# Altium PCB PCB2.PcbDoc
Units mil, origin at the board's own origin, x right, y up, seen from the top; angles counter-clockwise.
Board outline 1205 x 1375 mil, 4 copper layers (Top Layer, Top Layer 1, Bottom Layer 1, Bottom Layer), stack 29.312 mil thick; 23 components, 28 nets, 122 pads, 18 vias.
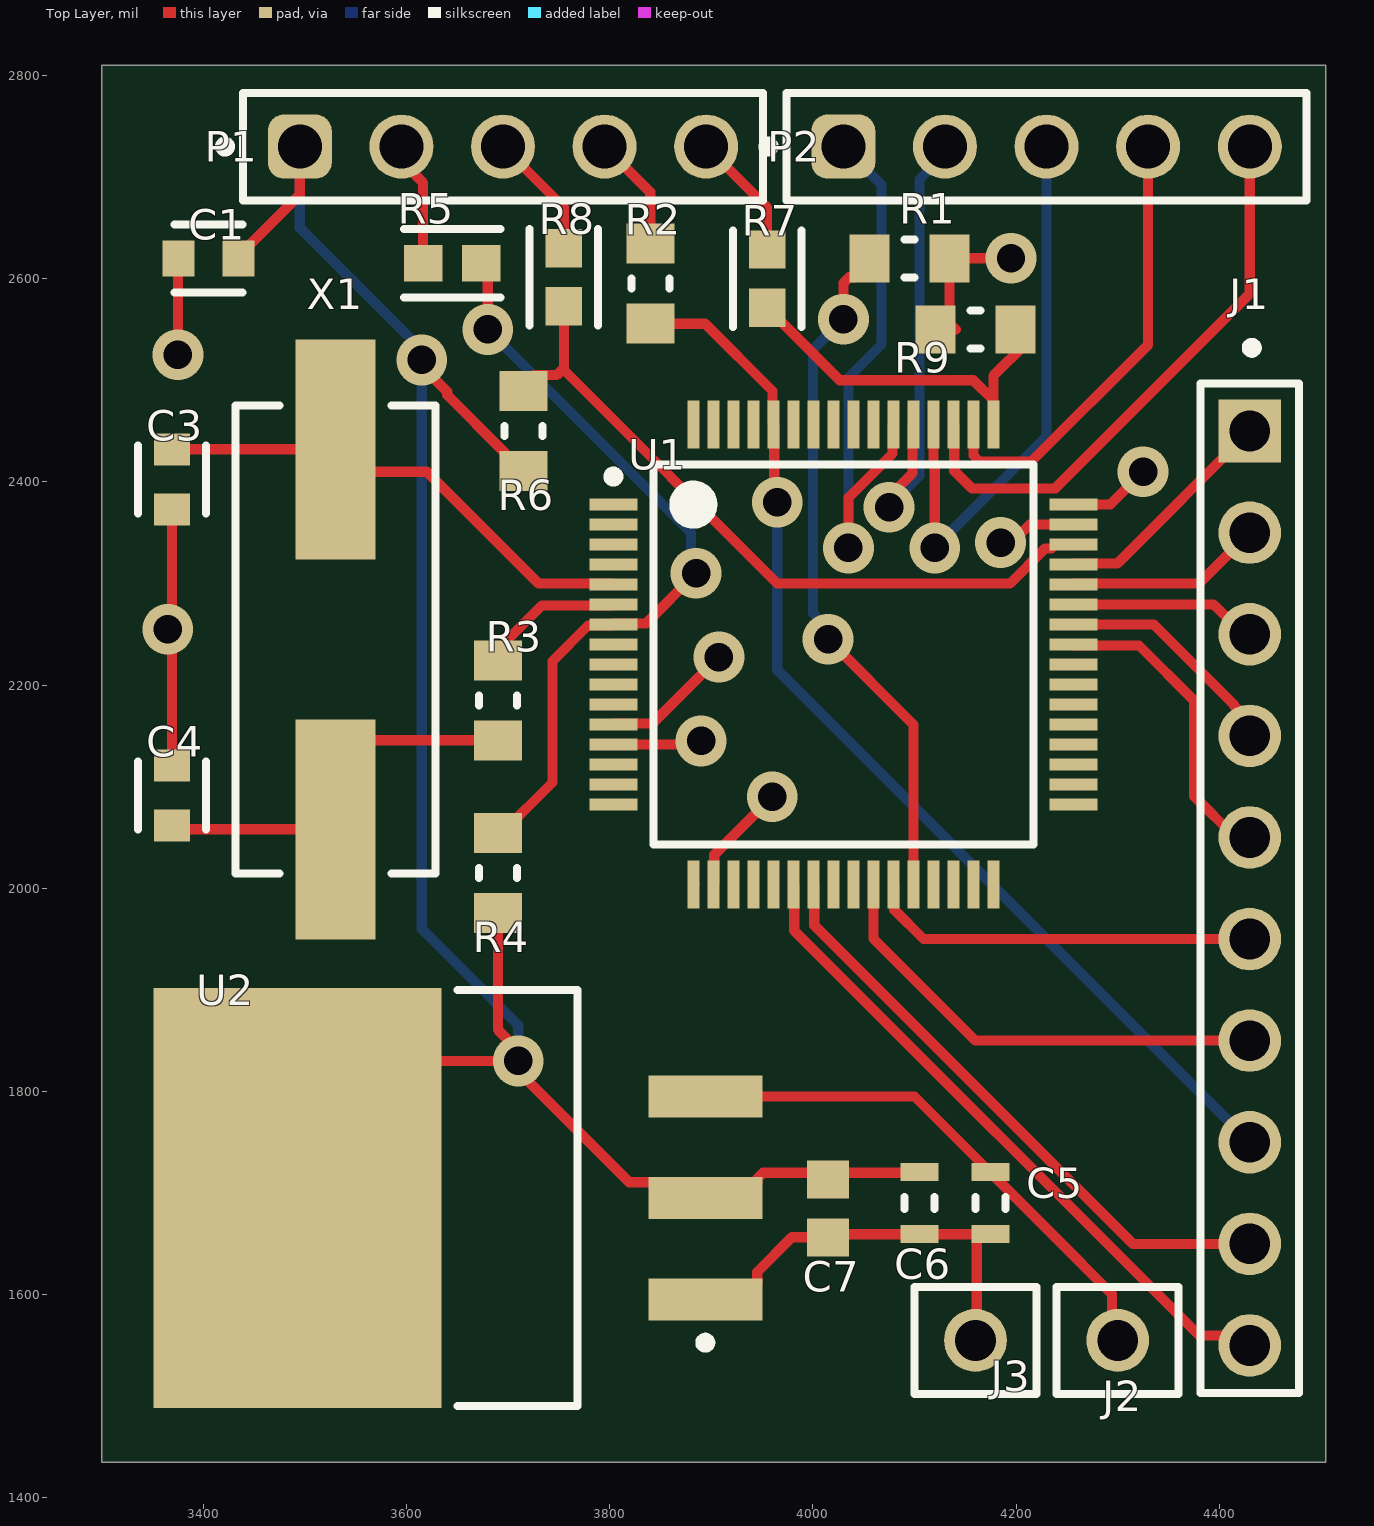
[diagram p0: Top Layer view]
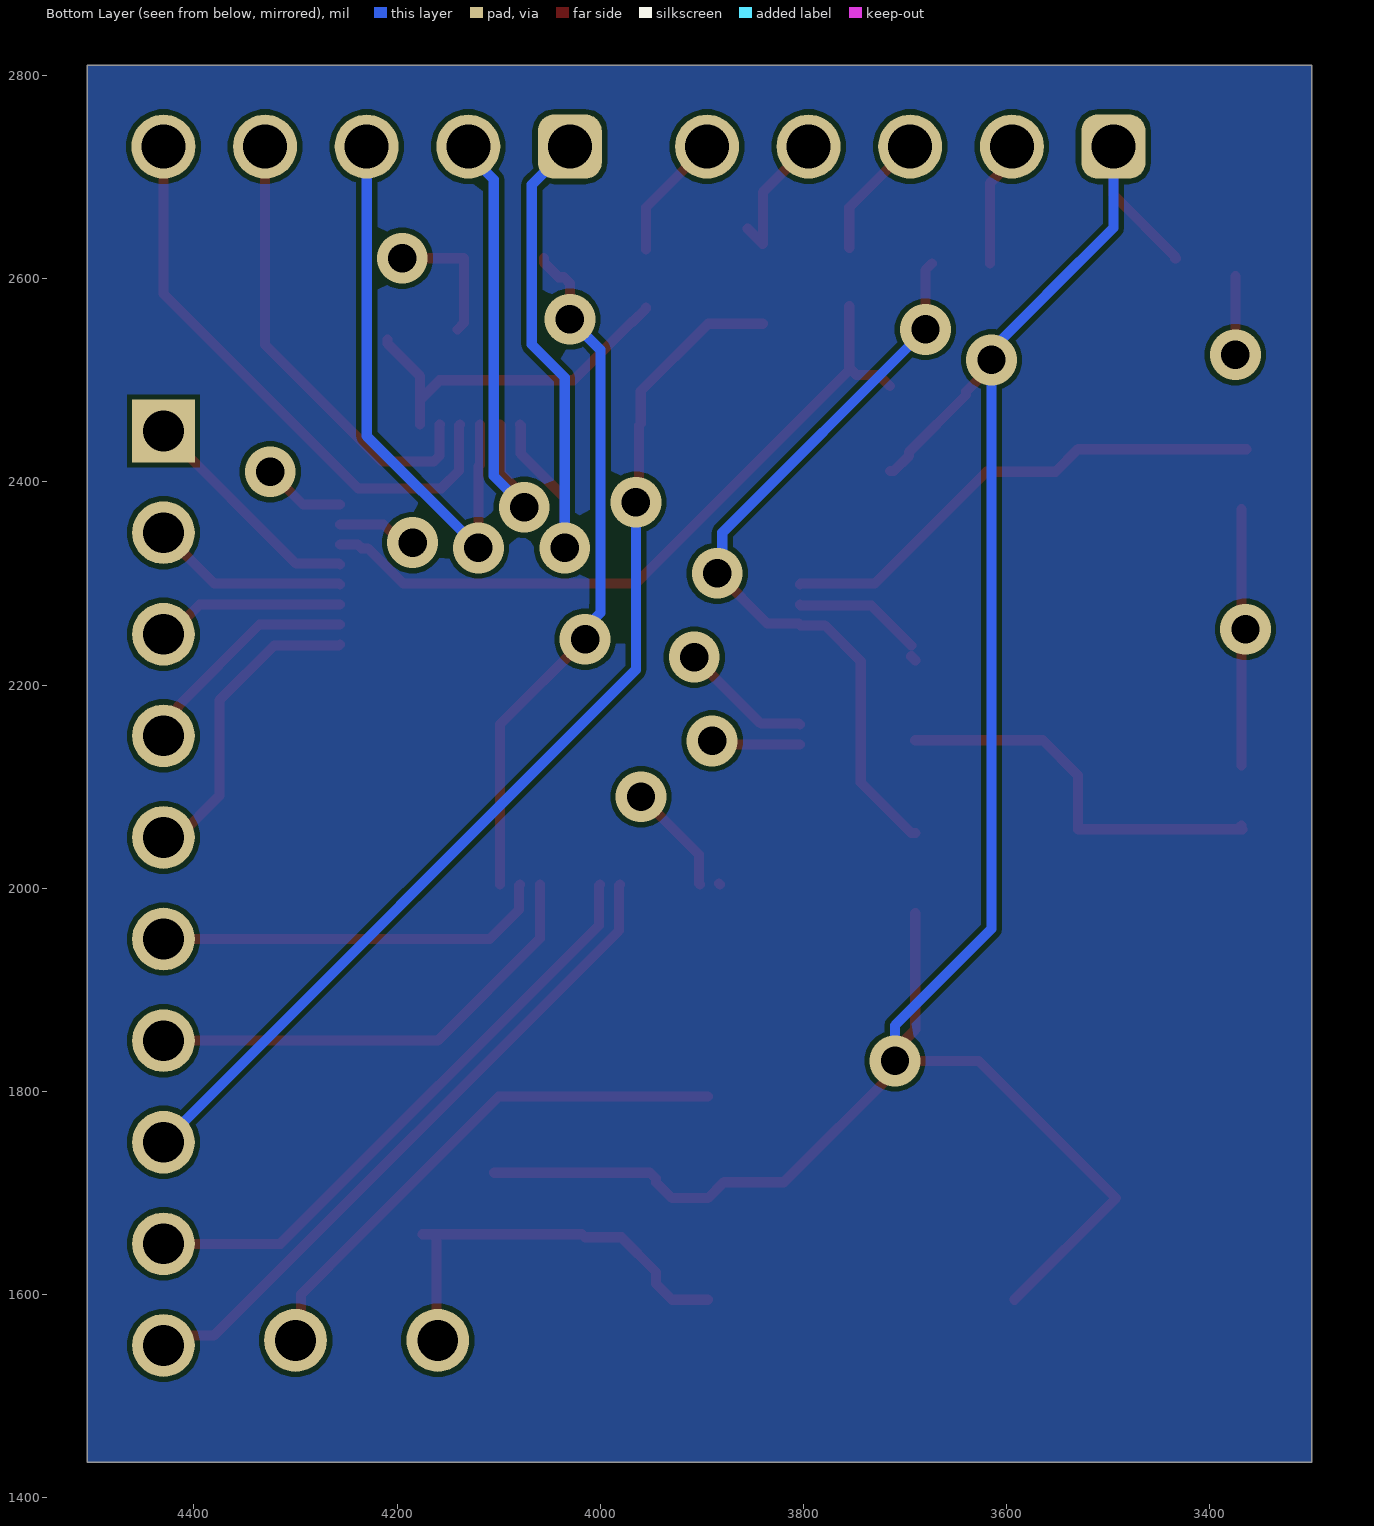
[diagram p1: Bottom Layer view, seen from below]
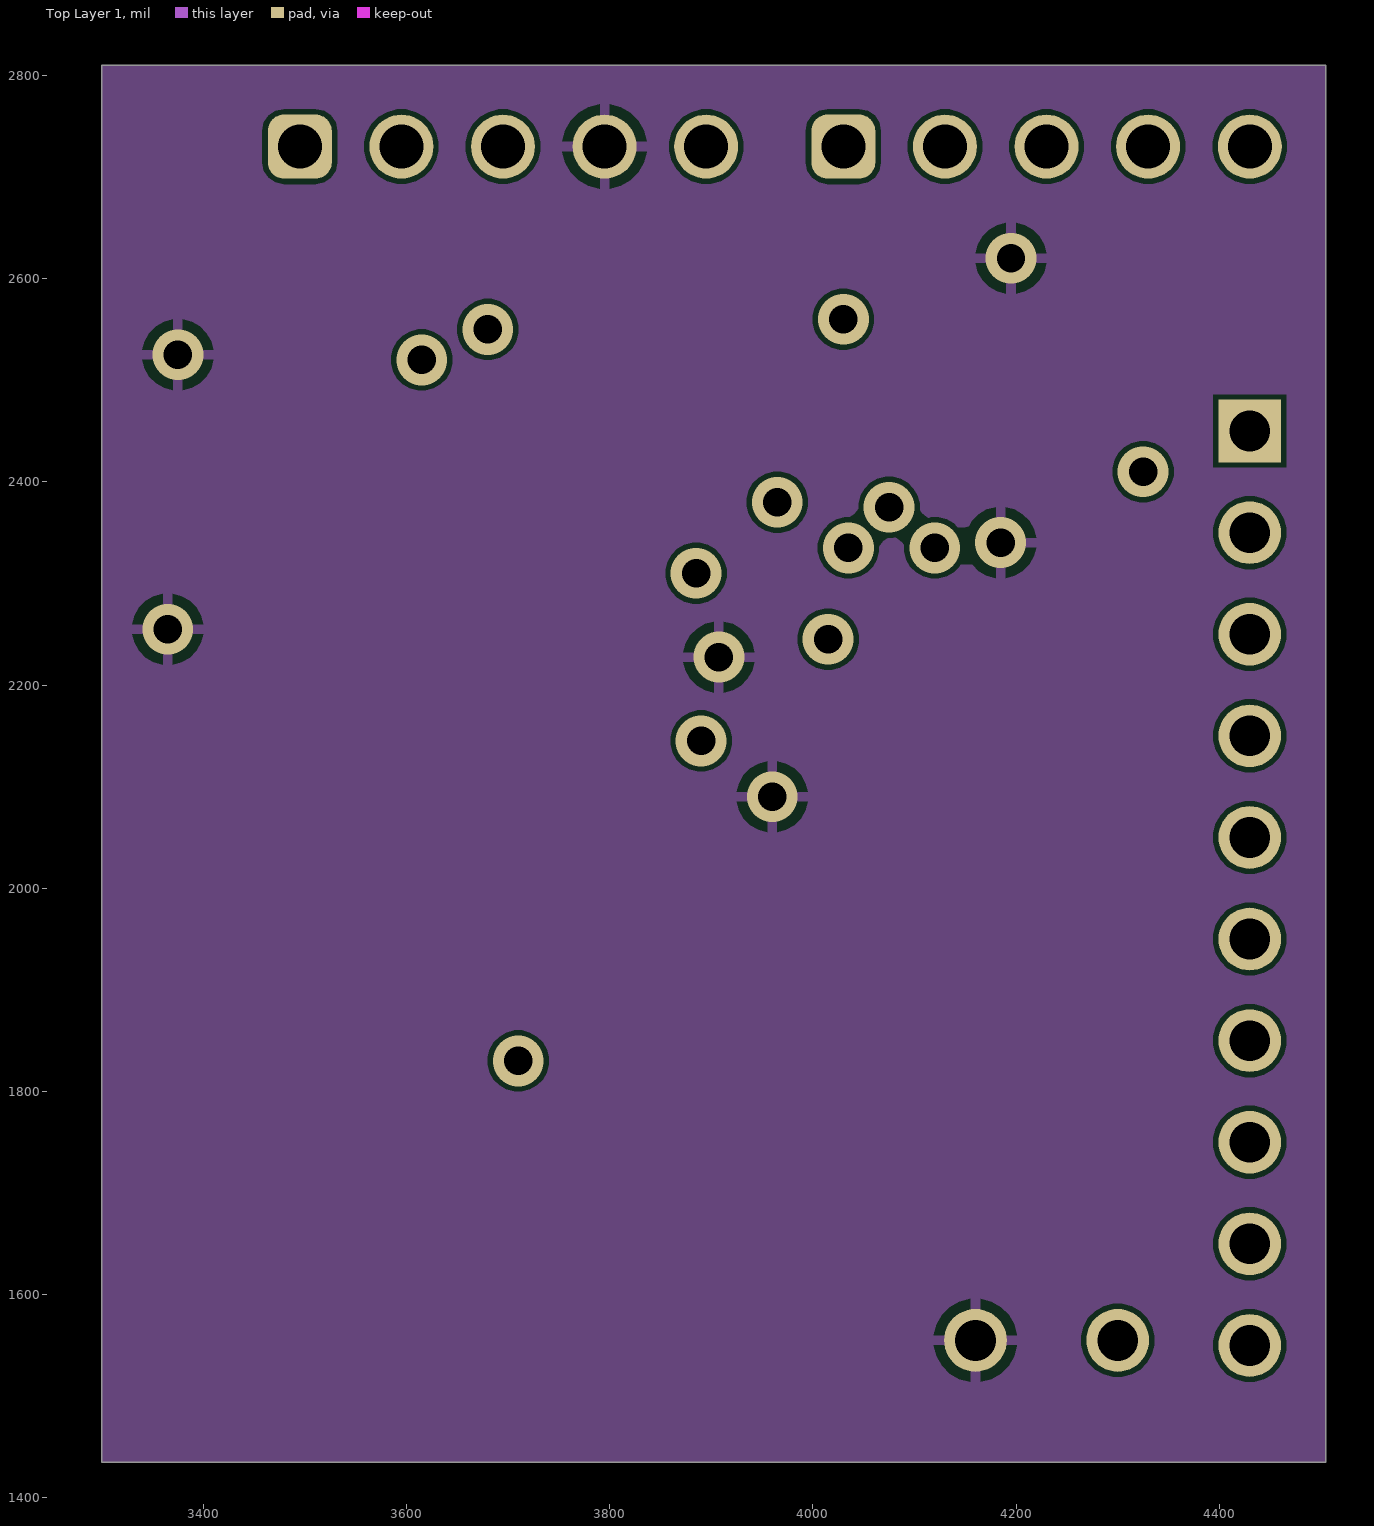
[diagram p2: Top Layer 1]
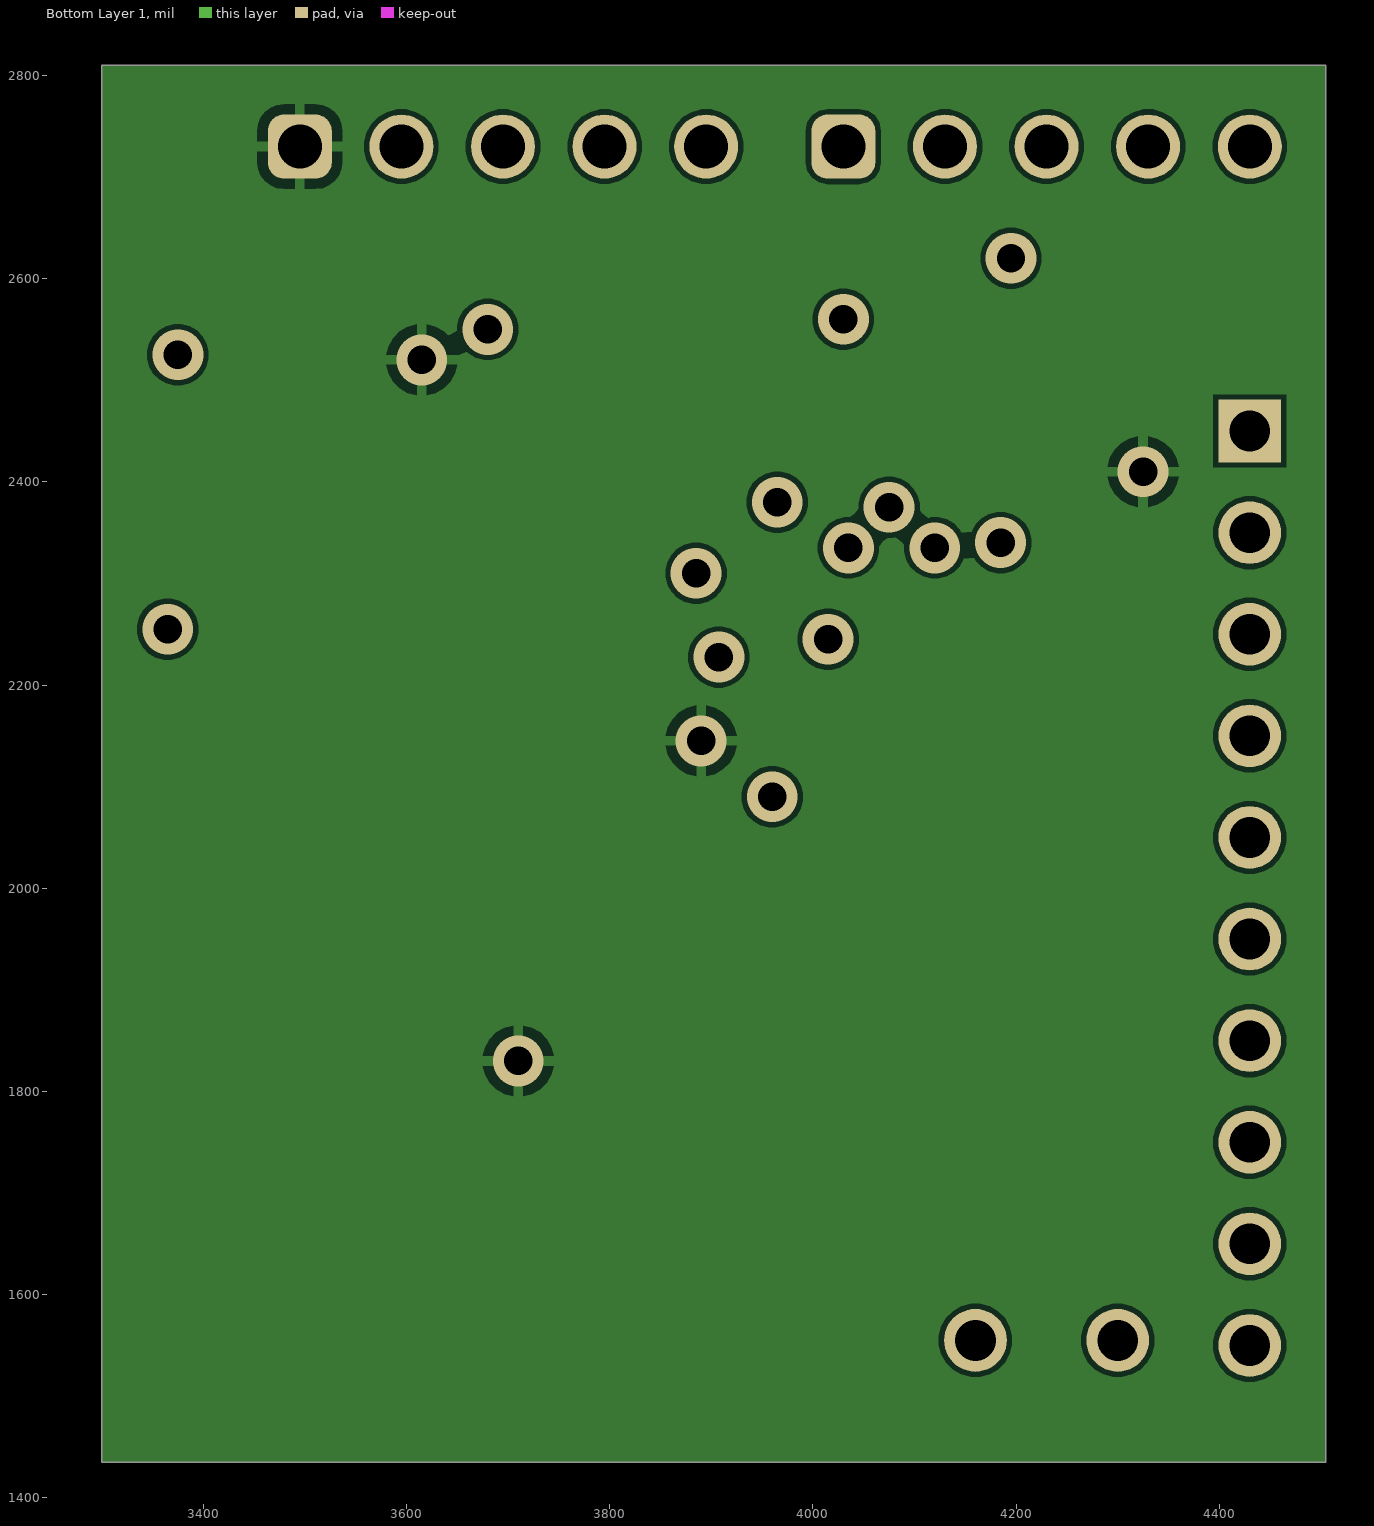
[diagram p3: Bottom Layer 1]
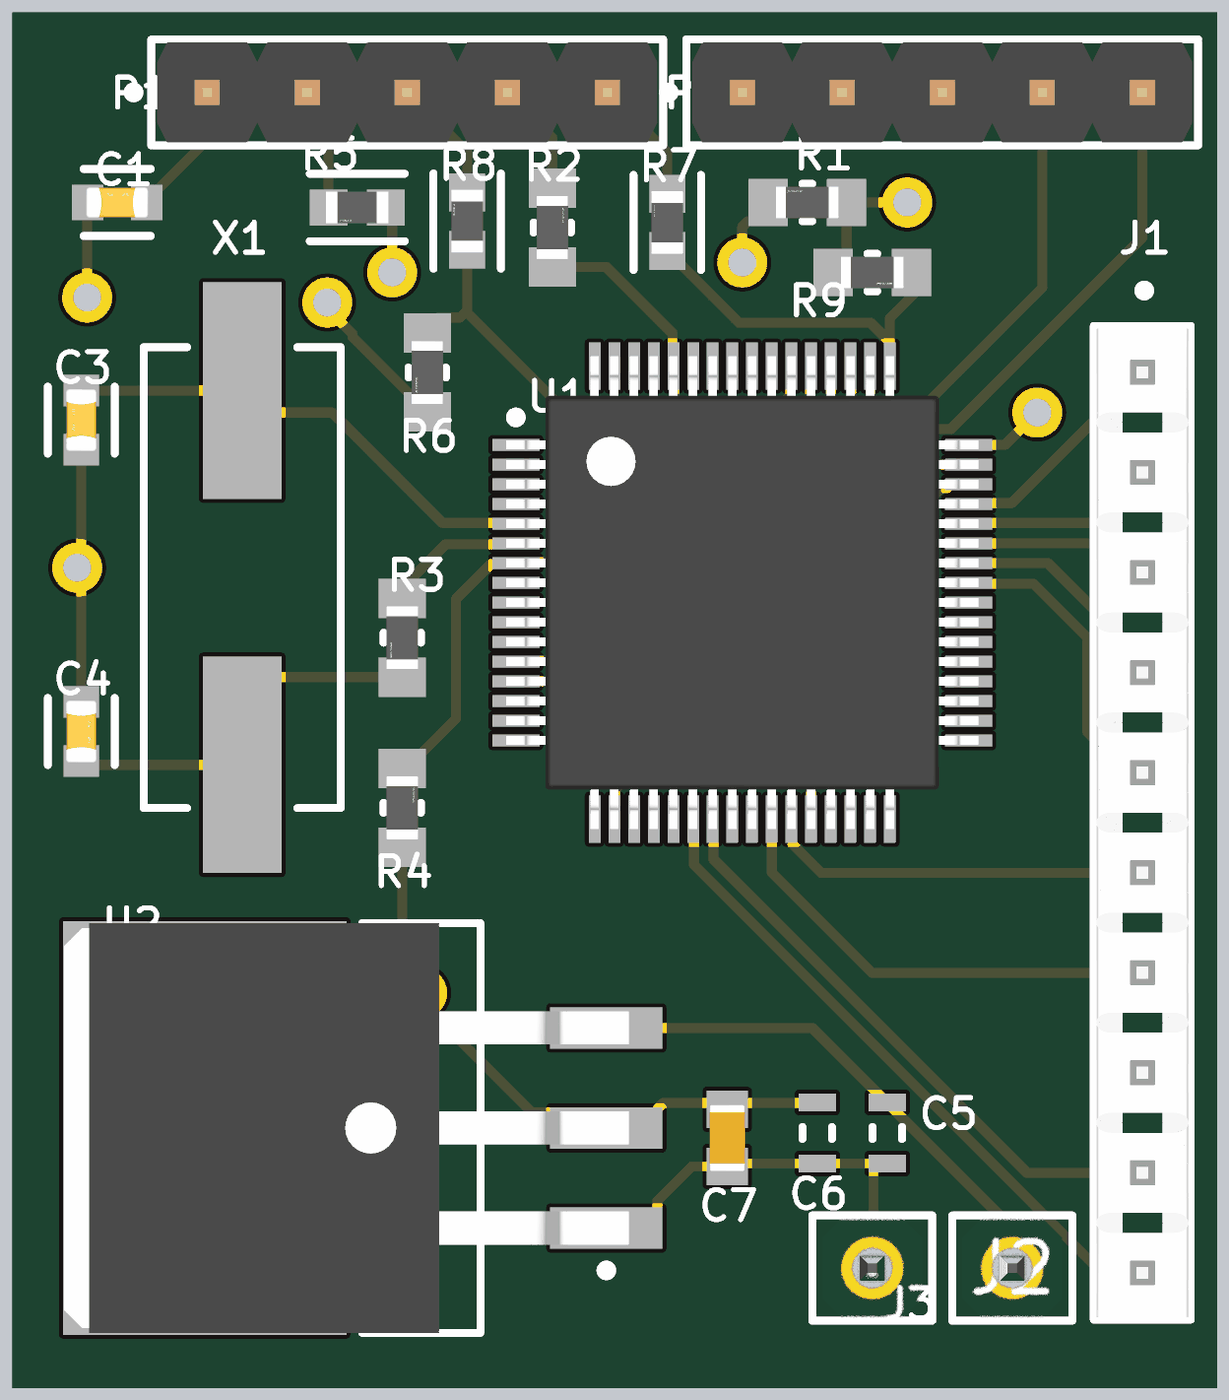
[diagram p4: 3D render of the assembled board from above, using the file's embedded part models]

## Layer stack, top to bottom
Top Solder: solder mask 0.4, Solder Resist, Dk 3.5
Top Layer: signal copper 1.378
Dielectric 4: prepreg 2.8, PP-006, Dk 4.1
Top Layer 1: signal copper 1.378
Dielectric 2: prepreg 2.8, PP-006, Dk 4.1
Dielectric 1: dielectric 12.6, FR-4, Dk 4.8
Dielectric 3: prepreg 2.8, PP-006, Dk 4.1
Bottom Layer 1: signal copper 1.378
Dielectric 5: prepreg 2.8, PP-006, Dk 4.1
Bottom Layer: signal copper 1.378
Bottom Solder: solder mask 0.4, Solder Resist, Dk 3.5

## Board outline
3300,1435 4505,1435 4505,2810 3300,2810

## Design rules (kind name [scope] priority, off if disabled: settings)
Clearance [All] p1: gap=5 ignorepadtopadclearanceinfootprint=FALSE
PolygonConnect [All] p1: connectstyle=Relief reliefconductorwidth=10 reliefentries=4 polygonreliefangle="90 Angle" airgapwidth=10
RoutingVias [All] p1: holewidth=28 width=50 viastyle="Through Hole" minholewidth=28 minwidth=50 maxholewidth=28 maxwidth=50
ShortCircuit [All] p1: allowed=TRUE
SolderMaskExpansion [All] p1: expansion=4 istentingtop=FALSE
SupplyNets "Schematic Supply Nets" [InNet('GND')] p1: voltage=0.000
Width [All] p1: maxlimit=10 minlimit=10 preferedwidth=10
29 further rules are at their usual default settings.

## Components (designator, comment, footprint, x,y, rotation, side; value= is the part's Value field where it differs from the comment)
C1 "CC0603KRX7R9BB104" FP-CC0603-DA-MFG 3405,2620 r180 top value="100 nF"
C3 "CC0603KRX7R9BB103" FP-CC0603-DA-MFG 3369.09,2402.48 r270 top value="10 nF"
C4 "CC0603KRX7R9BB103" FP-CC0603-DA-MFG 3369.09,2091.26 r90 top value="10 nF"
C5 "TPCL105M010R5000" CAPC1609X100X15LL20 4175,1690 r90 top
C6 "TPCL105M010R5000" CAPC1609X100X15LL20 4105,1690 r90 top
C7 "GRM188R71H103KA01D" CAPC1608X90X35ML10T15 4015,1685 r90 top
J1 "4-644456-0" FP-4-644456-0-MFG 4430,2000 r90 top
J2 "PBC01SAAN" FP-PBC01SAAN-MFG 4300,1555 r180 top
J3 "PBC01SAAN" FP-PBC01SAAN-MFG 4160,1555 r0 top
P1 "61300511121" 61300511121 3695,2730 r0 top
P2 "61300511121" 61300511121 4230,2730 r0 top
R1 "CR0603-FX-1002EAS" FP-CR0603-AS-MFG 4095,2620 r0 top
R2 "CR0603-FX-1002EAS" FP-CR0603-AS-MFG 3840,2595 r270 top
R3 "CR0603-FX-1002EAS" FP-CR0603-AS-MFG 3690,2185 r90 top
R4 "CR0603-FX-1002EAS" FP-CR0603-AS-MFG 3690,2015 r270 top
R5 "CR0603-FX-33R0ELF" FP-CR0603-IPC_B 3645,2615 r180 top
R6 "CR0603-FX-1002EAS" FP-CR0603-AS-MFG 3715,2450 r90 top
R7 "CR0603-FX-33R0ELF" FP-CR0603-IPC_B 3955,2600 r90 top
R8 "CR0603-FX-33R0ELF" FP-CR0603-IPC_B 3755,2601.38 r90 top
R9 "CR0603-FX-1002EAS" FP-CR0603-AS-MFG 4160,2550 r180 top
U1 "STM32F103RBT6TR" STM-LQFP64_V 4030,2230 r0 top
U2 "LM1117SX-3.3/NOPB" KTT0003B_N 3650,1695 r180 top
X1 "FOXSDLF/160-20" FOX-FOXSDLF160-20_V 3530,2245 r90 top

## Footprints (in the part's own frame and the unit in brackets; to place one, negate y for a bottom-side part, rotate by r counter-clockwise, add the part's x,y. Pads: shape width x height; smd on the part's side, far side on the other; paste and mask are expansions set on the pad)
61300511121 [mm] "Pin Header, pitch 2.54 mm, THT, Vertical, single row, 5p"
  rrect50% 1.6x1.6 hole 1.1: 1(-5.08,0)
  round 1.6 hole 1.1: 2(-2.54,0) 3(0,0) 4(2.54,0) 5(5.08,0)
  silkscreen extent -7.07,-1.35 6.5,1.35, body extent -6.35,-1.27 6.35,1.27, height 8.57
CAPC1608X90X35ML10T15 [mm] "Chip Capacitor, 2-Leads, Body 1.7x0.9mm, IPC Low Density"
  rect 0.95x1.05 smd: 1(-0.725,0) 2(0.725,0)
  body extent -0.85,-0.45 0.85,0.45, height 0.9
CAPC1609X100X15LL20 [mm] "Chip Capacitor, 2-Leads, Body 1.60x0.85mm, IPC High Density"
  rect 0.45x0.95 smd: 1(-0.775,0) 2(0.775,0)
  silkscreen extent -0.15,-0.38 0.15,0.38, body extent -0.9,-0.53 0.9,0.53, height 1
FOX-FOXSDLF160-20_V [mm] "SMD, 2-Leads, Body 5x11.7mm, Height 4.5mm"
  rect 5.5x2 smd: 1(-4.75,0) 2(4.75,0)
  silkscreen extent -5.85,-2.5 5.85,2.5, body extent -5.85,-2.5 5.85,2.5, height 4.5
FP-4-644456-0-MFG [mil]
  rect 61.65x61.65 hole 40 paste-99999 mask+0: 1(450,0)
  round 61.65 hole 40 paste-99999 mask+0: 2(350,0) 3(250,0) 4(150,0) 5(50,0) 6(-50,0) 7(-150,0) 8(-250,0) 9(-350,0) 10(-450,0)
  silkscreen extent -497,-49 537,49, body extent -500,-52 500,52, height 10
FP-CC0603-DA-MFG [mm]
  rect 0.8x0.9 smd paste+0 mask+0: 1(-0.75,0) 2(0.75,0)
  silkscreen extent -0.85,-0.85 0.85,0.85, body extent -1.35,-0.75 1.35,0.75, height 0.25
FP-CR0603-AS-MFG [mm]
  rect 1x1.2 smd paste+0 mask+0: 1(-1,0) 2(1,0)
  silkscreen extent -0.13,-0.48 0.13,0.48, body extent -1.6,-0.7 1.6,0.7, height 0.25
FP-CR0603-IPC_B [mil]
  rect 37.72x35.91 smd paste+0 mask+0: 1(-28.62,0) 2(28.62,0)
  silkscreen extent -47,-34 47,34, body extent -57,-28 57,28, height 10
FP-PBC01SAAN-MFG [mm]
  round 1.57 hole 1.02 paste-2539.97 mask+0: 1(0,0)
  silkscreen extent -1.53,-1.34 1.53,1.34, body extent -1.63,-1.44 1.63,1.44, height 0.25
KTT0003B_N [mm] "D2-PAK, 3-Leads, Body 10.41x8.89mm, Pitch 2.54mm, IPC Medium Density"
  rect 2.85x1.05 smd: 1(-6.2,2.54) 2(-6.2,0) 3(-6.2,-2.54)
  rect 7.2x10.5 smd: 4(4,0)
  silkscreen extent -6.33,-5.2 0,5.2, body extent -6.78,-5.2 7.57,5.2, height 4.64
STM-LQFP64_V [mm] "Thin QFP, 64-Leads, Body 10x10mm, Pitch 0.5mm, ST Recommended"
  rect 1.2x0.3 smd: 1(-5.75,3.75) 2(-5.75,3.25) 3(-5.75,2.75) 4(-5.75,2.25) 5(-5.75,1.75) 6(-5.75,1.25) 7(-5.75,0.75) 8(-5.75,0.25) 9(-5.75,-0.25) 10(-5.75,-0.75) 11(-5.75,-1.25) 12(-5.75,-1.75) 13(-5.75,-2.25) 14(-5.75,-2.75) 15(-5.75,-3.25) 16(-5.75,-3.75) 33(5.75,-3.75) 34(5.75,-3.25) 35(5.75,-2.75) 36(5.75,-2.25) 37(5.75,-1.75) 38(5.75,-1.25) 39(5.75,-0.75) 40(5.75,-0.25) 41(5.75,0.25) 42(5.75,0.75) 43(5.75,1.25) 44(5.75,1.75) 45(5.75,2.25) 46(5.75,2.75) 47(5.75,3.25) 48(5.75,3.75)
  rect 0.3x1.2 smd: 17(-3.75,-5.75) 18(-3.25,-5.75) 19(-2.75,-5.75) 20(-2.25,-5.75) 21(-1.75,-5.75) 22(-1.25,-5.75) 23(-0.75,-5.75) 24(-0.25,-5.75) 25(0.25,-5.75) 26(0.75,-5.75) 27(1.25,-5.75) 28(1.75,-5.75) 29(2.25,-5.75) 30(2.75,-5.75) 31(3.25,-5.75) 32(3.75,-5.75) 49(3.75,5.75) 50(3.25,5.75) 51(2.75,5.75) 52(2.25,5.75) 53(1.75,5.75) 54(1.25,5.75) 55(0.75,5.75) 56(0.25,5.75) 57(-0.25,5.75) 58(-0.75,5.75) 59(-1.25,5.75) 60(-1.75,5.75) 61(-2.25,5.75) 62(-2.75,5.75) 63(-3.25,5.75) 64(-3.75,5.75)
  silkscreen extent -5.87,-4.75 4.75,4.75, body extent -6,-6 6,6, height 1.6

## Part data
C1: library part CMP-2100-03601-2, "CAP CER 0.1UF 50V X7R 0603", Capacitance="100 nF", Manufacturer=YAGEO, Package=CC0603-DA, Temperature="-55°C to +125°C", Temperature Characteristic=X7R, Temperature Coefficient=15%, Temperature Range High=+125°C, Temperature Range Low=-55°C, Tolerance=0.1, Voltage="50 V", Automotive=No, Category=Cap, ComponentLink2Description=Datasheet, ComponentLink2URL=http://www.yageo.com/documents/recent/UPY-GPHC_X7R_6.3V-to-50V_18.pdf, Device Class L1="Passive Components", Device Class L2=Capacitors, Device Class L3="Ceramic Capacitors", Digikey Description="CAP CER 0.1UF 50V X7R 0603", Footprint Url=http://www.yageo.com/exep/pages/download/literatures/UPY-C_GEN_24.pdf, Height=0.9mm, Lead Free=Yes, Manufacturer Part Number=CC0603KRX7R9BB104, Material=Ceramic, Mouser Description="Multilayer Ceramic Capacitor, CC Series, 0.1 - F, - 10%, X7R, 50 V, 0603 [1608 Metric]", Octopart=https://octopart.com/cc0603krx7r9bb104-yageo-42244635, RoHS=TRUE, Voltage Rating="50 V"
C3 C4: library part CMP-2100-03600-2, "CAP CER 10000PF 50V X7R 0603", Capacitance="10 nF", Manufacturer=YAGEO, Package=CC0603-DA, Temperature="-55°C to +125°C", Temperature Characteristic=X7R, Temperature Coefficient=15%, Temperature Range High=+125°C, Temperature Range Low=-55°C, Tolerance=0.1, Voltage="50 V", Automotive=No, Category=Cap, ComponentLink2Description=Datasheet, ComponentLink2URL=http://www.yageo.com/documents/recent/UPY-GPHC_X7R_6.3V-to-50V_18.pdf, Device Class L1="Passive Components", Device Class L2=Capacitors, Device Class L3="Ceramic Capacitors", Digikey Description="CAP CER 10000PF 50V X7R 0603", Footprint Url=http://www.yageo.com/exep/pages/download/literatures/UPY-C_GEN_24.pdf, Height=0.9mm, Lead Free=Yes, Manufacturer Part Number=CC0603KRX7R9BB103, Material=Ceramic, Mouser Description="Multilayer Ceramic Capacitor, CC Series, 0.01 - F, - 10%, X7R, 50 V, 0603 [1608 Metric]", Octopart=https://octopart.com/cc0603krx7r9bb103-yageo-192938, RoHS=TRUE, Voltage Rating="50 V"
C5 C6: library part CMP-2006-00208-1, Manufacturer="AVX Interconnect / Elco", Part Number=TPCL105M010R5000
C7: library part CMP-2100-03642-1, "Chip Capacitor, 10 nF, +/- 10%, 50 V, -55 to 125 degC, 0603 (1608 Metric), RoHS, Tape and Reel", Capacitance=10nF, Case Code (Imperial)=0603, Case Code (Metric)=1608, Dielectric=X7R, Dielectric Material=Ceramic, Insulation Resistance=10GR, Manufacturer=Murata, Max Operating Temperature=125degC, Min Operating Temperature=-55degC, Package Description="2-Pin Surface Mount Device, Body 1.6 x 0.8 mm", Package Quantity=1, Tolerance=10%, Voltage=50V, Case/Package=0603, Datasheet URL=http://search.murata.co.jp/Ceramy/image/img/A01X/G101/ENG/GRM188R71H103KA01-01.pdf, Datasheet Version=42401.0, Depth=0.8mm, Height=0.8mm, Lead Free=LeadFree, Length=1.6mm, Manufacturer URL=http://www.murata.com/, Material=Ceramic, Mount=SurfaceMount, Number of Pins=2, Package Reference=0603, Packaging=TapeandReel, REACH SVHC=Unknown, RoHSCompliant=True, Termination=SMD/SMT, Thickness=0.035inch, Voltage Rating=50V, Voltage Rating (DC)=50V, Width=0.031inch
J1: library part CMP-03369-000038-1, "CONN HEADER VERT 10POS 2.54MM", Current Rating=5A, Manufacturer="TE Connectivity", Temperature="-55°C to +105°C", Temperature Range High=+105°C, Temperature Range Low=-55°C, Voltage Rating=250V, Automotive=No, Category=Conn, ComponentLink2Description=Datasheet, ComponentLink2URL=https://www.te.com/commerce/DocumentDelivery/DDEController?Action=showdoc&DocId=Data+Sheet%7F82056_MTA%7F0818%7Fpdf%7FEnglish%7FENG_DS_82056_MTA_0818.pdf%7F4-644456-0, Conn Gender=Male, Conn Orientation=Vertical, Contact Material=Tin, Device Class L1=Connectors, Device Class L2="Headers and Wire Housings", Device Class L3=unset, Digikey Description="CONN HEADER VERT 10POS 2.54MM", Footprint Url=https://www.te.com/commerce/DocumentDelivery/DDEController?Action=showdoc&DocId=Customer+Drawing%7F644456%7FD2%7Fpdf%7FEnglish%7FENG_CD_644456_D2.pdf%7F4-644456-0, Height=0.408inch, Lead Free=Yes, Manufacturer Part Number=4-644456-0, Mouser Description="Headers & Wire Housings NARROW FLT HDR 10P Straight Post", Number of Contacts=10, Number of Rows=1, Octopart=https://octopart.com/4-644456-0-te+connectivity-39514173, Package=4-644456-0, Pitch=2.54mm, RoHS=TRUE
J2 J3: library part CMP-25680-000032-1, "CONN HEADER VERT 1POS", Color=Black, Package Quantity=1, Connector Type="Male Pin", Contact Material=Bronze, Contact Mating Length=0.23inch, Contact Plating=Gold, Gender=Male, Height=2.54mm, Housing Color=Black, Housing Material=Plastic, Lead Free="Lead Free", Length=2.54mm, Mount="Through Hole", Number of Contacts=1, Number of Positions=1, Number of Rows=1, Packaging=Bulk, Pitch=2.54mm, Termination=Solder, Width=2.54mm
P1 P2: library part CMP-1502-01068-3, Color=Black, Contact Resistance=20mΩ, Current Rating=3A, Max Operating Temperature=105°C, Min Operating Temperature=-40°C, Operating Supply Voltage=250V, Connector Type="Male Pin", Contact Material=Copper, Contact Mating Length=5.9944mm, Contact Plating=Gold, Gender=Male, Height=8.89mm, Lead Free="Lead Free", Lead Pitch=2.54mm, Mount="Through Hole", NexarPartId=32855526, Number of Contacts=5, Number of Pins=5, Number of Positions=5, Number of Rows=1, Orientation=Vertical, Packaging=Bulk, Pitch=2.54mm, REACH SVHC=Unknown, RoHS=Compliant, Termination=Solder, Voltage Rating=250V
R1 R2 R3 R4 R6 R9: library part CMP-07231-000018-1, "RES 10K OHM 1% 1/10W 0603", Case Code (Imperial)=0603, Case Code (Metric)=1608, Max Operating Temperature=155°C, Max Power Dissipation=10mW, Min Operating Temperature=-55°C, Resistance=10kR, Temperature Coefficient=100ppm/°C, Tolerance=1%, Case/Package=0603, Composition="Thick Film", Features=Anti-Sulfur, Number of Terminations=2, Packaging="Cut Tape"
R5 R7 R8: library part CMP-07231-006573-1, "Thick Film Chip Resistors 0603 33Ω 0.1W 1% 100ppm/°C", Case Code (Imperial)=0603, Case Code (Metric)=1608, Max Operating Temperature=155°C, Max Power Dissipation=100mW, Min Operating Temperature=-55°C, Package Quantity=5000, Resistance=33R, Resistance Tolerance=1%, Resistor Type="Thick Film", Temperature Coefficient=100ppm/°C, Voltage Rating=50V, Case/Package=0603, Construction=Rectangular, Contact Plating=Tin, Depth=0.8mm, Features="Moisture Resistant", Height=0.45mm, Length=1.6mm, Military Standard=Not, Mount="Surface Mount", Number of Terminations=2, Packaging="Tape and Reel", Power Rating=100mW, Radiation Hardening=No, REACH SVHC="No SVHC", RoHS Compliant=Yes, Series=CR0603, Termination=SMD/SMT, Thickness=457um, Tolerance=1%, Voltage Rating (DC)=50V, Width=0.8mm
U1: library part CMP-0237-00169-4, "ARM Cortex-M3 32-bit MCU, 128 KB Flash, 20 KB Internal RAM, 51 I/Os, 64-pin LQFP, -40 to 85 degC, Tape and Reel", I/Os (High Current)=51, Operating Frequency(F) (Processor speed) (MHz)=72, Supply Voltage(Vcc) min (V)=2, A/D Converter="2x12-bit (16 Channel)", ComponentLink1Description="Manufacturer URL", ComponentLink1URL=http://www.st.com/web/en/home.html, ComponentLink2Description=Datasheet, ComponentLink2URL=http://www.st.com/st-web-ui/static/active/en/resource/technical/document/datasheet/CD00161566.pdf, ComponentLink3Description="Package Specification", ComponentLink3URL=http://www.st.com/st-web-ui/static/active/en/resource/technical/document/datasheet/DM00037051.pdf, Core="ARM Cortex-M3", DatasheetVersion="Rev. 16", FLASH Size (Prog) (kB)=128, Internal RAM Size (kB)=20, Mounting Technology="Surface Mount", PackageDescription="64-Pin Low Profile Quad Flat Package, 10 x 10 mm Body, 0.5 mm Pitch", PackageReference=LQFP64, PackageVersion="Rev. 4, 06/2013", Packing="Tape and Reel", PartNumber=STM32F103RBT6TR
U2: library part CMP-0062-00678-5, "800mA Low-Dropout Linear Regulator, 3-pin TO-263, Pb-Free", Manufacturer="Texas Instruments", PackageTopMarking=NSUZXYTTE#*LM1117S*3.3, PowerWise=N, Code_JEDEC=MO-169-AA, ComponentLink1Description="Datasheet URL", ComponentLink1URL=http://www.ti.com/general/docs/lit/getliterature.tsp?genericPartNumber=LM1117&fileType=pdf, CompType="LDO IC", High-Reliability=Y, PackageDescription="TO-263, Molded, .400 x .390 x .180in, 3 Lead, .1in Pitch, Surface Mount", PackageReference=KTT0003B, PartNumber=LM1117SX-3.3/NOPB, PinCount=3, RoHS=Y
X1: library part CMP-1749-00001-1, "Resistance Weld SMD Crystal, 16 MHz, +/- 30 ppm, 20 pF, -20 to 70 degC, 2-Pin SMD, RoHS, Tape and Reel", Case\Package=SOT-553-6, Max Operating Temperature="150 degC", Max Supply Voltage="3.3 V", Max Supply Voltage (DC)="6 V", Min Operating Temperature="-55 degC", Min Supply Voltage="1.4 V", Min Supply Voltage (DC)="4 V", Output Current="3 mA", Package Quantity=1, ComponentLink1Description="Manufacturer URL", ComponentLink1URL=http://www.foxonline.com/, ComponentLink2Description=Datasheet, ComponentLink2URL=http://foxonline.com/pdfs/hc49sdlf.pdf, DatasheetVersion=Mar-15, Height="0.55 mm", Interface=I2C, Length="1.6 mm", Mount="Surface Mount", PackageDescription="2-Pin Surface Mount Device, Body 5 x 11.7 mm, Height 4.5 mm", PackageReference=FOX-FOXSDLF160-20, Packaging="Cut Tape", Pins=6, Radiation Hardening=No, REACH SVHC="No SVHC", RoHSCompliant=true, Weight="9.9E-05 oz", Width="1.2 mm"

## Via types
v1: diameter 50, hole 28, Top Layer to Bottom Layer, 18 vias

## Nets (pads, with @x,y where several pads share a name; then routed paths per layer and width w, separated by ;. In a path a pad name is that pad's centre, name@x,y a point inside that pad or via, vN(x,y) a via of type N, cw(c..) or ccw(c..) an arc to the next point about the centre after c; other vN are vias at no path point)
GND: C1.2 C3.2 C4.2 C5.1 C6.1 C7.1 J3.1 P1.4 R1.2 R2.1 R9.2 U2.1 | length 1026.4
  Top Layer w10: C4.2 C3.2 ; v1(3375,2525) C1.2@3375,2602.56 ; P1.4 3840,2685 R2.1 3840.31,2634.37 R2.1@3855,2649.06 ; U2.1 3929.53,1595 3945.2,1610.67 3945.2,1622.32 3979.33,1656.46 C7.1 4018.03,1659.49 C6.1 C5.1@4165.16,1659.49 ; 4140.63,2550 4134.37,2556.26 R1.2 v1(4195,2620) ; J3.1 4161.3,1556.3 4161.3,1655.63 C5.1@4165.16,1659.49 ; C5.1 C5.1@4165.16,1659.49
  Bottom Layer w10: v1(3365,2255) v1@3370,2260
  other v1: 3960,2090 3907.5,2227.5 4184.81,2340.19
NetC1_1: C1.1 C6.2 C7.2 P1.1 R4.2 R6.1 U2.2 U2.4 | length 2322.7
  Top Layer w10: C1.1@3433.59,2620 C1.1 3434.53,2621.97 3495,2682.44 P1.1 ; U2.4@3592.52,1595 U2.4 3627.52,1830 v1(3710,1830) ; v1(3615,2520) 3615,2513.76 3640.17,2488.6 3640.17,2485.46 3696.38,2429.25 3696.38,2425.32 3711.06,2410.63 R6.1 ; R4.2 3690,1860.82 3710,1840.82 v1(3710,1830) ; C6.2@4104.55,1720 3951.05,1720 3945.2,1714.14 3945.2,1710.67 3929.53,1695 U2.2 3878.43,1710.67 3819.33,1710.67 3710,1820 v1(3710,1830)
  Bottom Layer w10: P1.1 3495,2650 3560,2585 3562.93,2582.07 3615,2530 v1(3615,2520) 3615,1960 3710,1865 v1(3710,1830) v1@3705,1835
  other v1: 3890,2145 4325,2410
NetC3_1: C3.1 U1.5 X1.2 | length 494.7
  Top Layer w10: C3.1@3364.09,2432.01 X1.2 3552.02,2409.99 3620.01,2409.99 3730.2,2299.8 3802.72,2299.8 U1.5
NetC4_1: C4.1 R3.1 X1.1 | length 395
  Top Layer w10: C4.1@3367.83,2057.99 X1.1 3530,2111.26 3564.37,2145.63 R3.1 ; C4.1 C4.1@3372.83,2057.99
NetC5_2: C5.2 J2.1 U2.3 | length 528.7
  Top Layer w10: U2.3 4100,1795 4237.5,1657.5 4294.48,1600.52 4294.48,1560.52 J2.1
NetJ1_1: J1.1 U1.45 | length 228.1
  Top Layer w10: U1.45 4257.28,2319.49 4299.49,2319.49 J1.1
NetJ1_2: J1.2 U1.44 | length 194.8
  Top Layer w10: U1.44 4257.28,2299.8 4379.8,2299.8 J1.2
NetJ1_3: J1.3 U1.43 | length 185.7
  Top Layer w10: U1.43 4394.4,2279.21 4423.62,2250 J1.3
NetJ1_4: J1.4 U1.42 | length 227.8
  Top Layer w10: U1.42 4335.47,2259.53 4415.1,2179.9 4415.1,2178.88 4430,2163.98 J1.4
NetJ1_5: J1.5 U1.41 | length 307.3
  Top Layer w10: U1.41 4257.28,2238.94 4321.06,2238.94 4375,2185 4375,2091.02 4416.02,2050 J1.5
NetJ1_6: J1.6 U1.27 | length 387
  Top Layer w10: U1.27 4080.12,2002.72 4080.12,1978.73 4108.85,1950 J1.6
NetJ1_7: J1.7 U1.26 | length 465.2
  Top Layer w10: U1.26 4059.53,1950.47 4160,1850 J1.7
NetJ1_8: J1.8 R2.2 U1.60 | length 1081.6
  Top Layer w10: R2.2 3893.94,2555.63 3960.2,2489.37 3960.2,2457.28 U1.60 3962.01,2455.47 3962.01,2382.99 v1(3965,2380)
  Bottom Layer w10: v1(3965,2380) 3965,2215 J1.8
NetJ1_9: J1.9 U1.23 | length 598.9
  Top Layer w10: U1.23 4001.38,2002.72 4001.38,1963.62 4315,1650 J1.9
NetJ1_10: J1.10 U1.22 | length 663.1
  Top Layer w10: U1.22 3981.69,2002.72 3981.69,1958.31 4380.12,1559.88 4420.12,1559.88 J1.10
NetP1_2: P1.2 R5.2 | length 123.9
  Top Layer w10: P1.2 3595,2715.66 3616.38,2694.28 R5.2
NetP1_3: P1.3 R8.2 | length 124.9
  Top Layer w10: P1.3 3755,2670 R8.2
NetP1_5: P1.5 R7.2 | length 126.2
  Top Layer w10: P1.5 3955,2670 R7.2
NetP2_1: P2.1 U1.54 | length 563.7
  Top Layer w10: v1(4035,2335) 4035,2384.5 4078.31,2427.8 4078.31,2455.47 U1.54
  Bottom Layer w10: P2.1 4067.49,2692.51 4067.49,2535.19 4035,2502.7 v1(4035,2335)
NetP2_2: P2.2 U1.53 | length 469.1
  Top Layer w10: v1(4075,2375) 4075,2385.58 4097.99,2408.58 4097.99,2455.47 U1.53
  Bottom Layer w10: v1(4075,2375) 4075,2375.82 4105,2405.82 4105,2697.65 4130,2722.65 P2.2
NetP2_3: P2.3 U1.52 | length 562.5
  Top Layer w10: U1.52 4118.58,2416.81 4120,2415.39 v1(4120,2335)
  Bottom Layer w10: v1(4120,2335) 4230,2445 P2.3
NetP2_4: P2.4 U1.50 | length 447.5
  Top Layer w10: U1.50 4158.17,2456.16 4158.17,2425.86 4164.03,2420 4215,2420 4330,2535 P2.4
NetP2_5: P2.5 U1.51 | length 568.2
  Top Layer w10: U1.51 4139.17,2455.47 4139.17,2410.83 4156.46,2393.54 4238.54,2393.54 4430,2585 P2.5
NetR1_1: R1.1 U1.28 | length 683.4
  Top Layer w10: v1(4015,2245) 4098.9,2161.1 U1.28 ; v1(4030,2560) 4030,2595.52 4035.86,2601.38 4040.94,2601.38 4055.63,2616.06 R1.1
  Bottom Layer w10: v1(4015,2245) 4015,2255.82 4000,2270.82 4000,2530 v1(4030,2560)
NetR3_2: R3.2 U1.6 | length 131.9
  Top Layer w10: R3.2 R3.2@3693.94,2228.31 ; R3.2@3693.94,2238.94 3733.31,2278.31 3802.72,2278.31 U1.6
NetR4_1: R4.1 R5.1 U1.7 | length 763.4
  Top Layer w10: R5.1 3680,2608.62 v1(3680,2550) ; R4.1 3693.94,2054.37 3743.68,2104.11 3743.68,2223.57 3778.73,2258.62 3802.72,2258.62 U1.7 3804.53,2260.43 3835.43,2260.43 v1(3885,2310)
  Bottom Layer w10: v1(3680,2550) 3880,2350 3880,2315 v1(3885,2310)
NetR6_2: R6.2 R8.1 U1.46 | length 712.4
  Top Layer w10: R6.2@3715,2494.37 3725.66,2505.03 3747.76,2505.03 3753.62,2510.89 ; R8.1 3755,2510 3965,2300 4194.13,2300 4228.61,2334.49 4231.9,2334.49 4234.88,2334.49 4238.66,2338.27 U1.46
NetR7_1: R7.1 R9.1 U1.49 | length 356.4
  Top Layer w10: R7.1 3955,2570.47 3967.96,2557.52 3968.86,2557.52 4026.38,2500 4158,2500 4176.73,2481.27 ; U1.49 4177.64,2504.33 4209.37,2536.06 R9.1@4209.37,2540
pads on no net: U1.1 U1.2 U1.3 U1.4 U1.8 U1.9 U1.10 U1.11 U1.12 U1.13 U1.14 U1.15 U1.16 U1.17 U1.18 U1.19 U1.20 U1.21 U1.24 U1.25 U1.29 U1.30 U1.31 U1.32 U1.33 U1.34 U1.35 U1.36 U1.37 U1.38 U1.39 U1.40 U1.47 U1.48 U1.55 U1.56 U1.57 U1.58 U1.59 U1.61 U1.62 U1.63 U1.64
copper on no net: | length 491.9
  Top Layer w10: 3803.62,2141.42 3886.42,2141.42 3890,2145 ; 3803.62,2161.1 3804.53,2162.01 3842.01,2162.01 3907.5,2227.5 ; 3882.36,2003.62 3883.27,2004.53 ; 3902.05,2003.62 3902.95,2004.53 3902.95,2032.95 3960,2090 ; 4184.81,2340.19 4195.64,2340.19 4213.41,2357.95 4256.38,2357.95 ; 4256.38,2377.64 4292.64,2377.64 4325,2410

## Polygon pours and split planes (outlines as drawn)
no net on Bottom Layer "NONET_L04_P005" (solid, pour order 5): 3300,1435 4505,1435 4505,2810 3300,2810
NetC1_1 on Bottom Layer 1 "NETC1_1_L03_P004" (solid, pour order 4): 3300,1435 4505,1435 4505,2810 3300,2810
GND on Top Layer 1 "GND_L02_P003" (solid, pour order 3): 3300,1435 4505,1435 4505,2810 3300,2810